# EAGLE board PCB_5 (EAGLE 6.5.0)
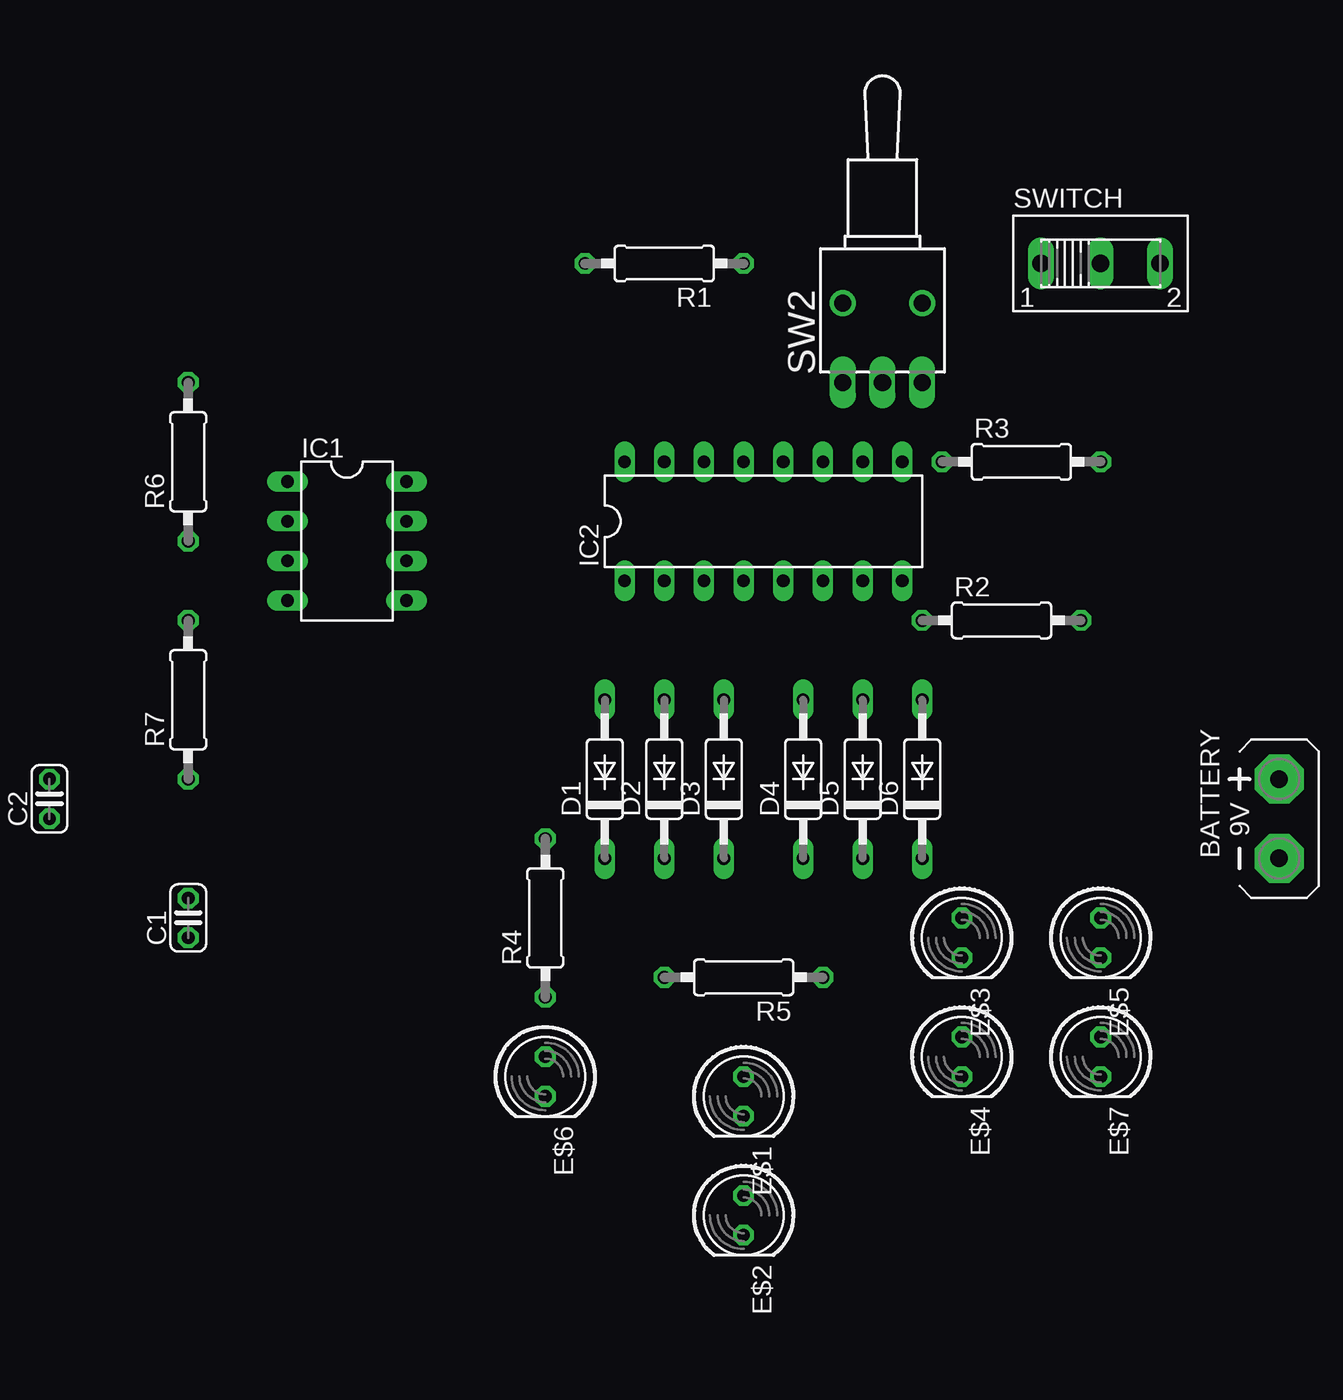
[diagram p0: board, top side]
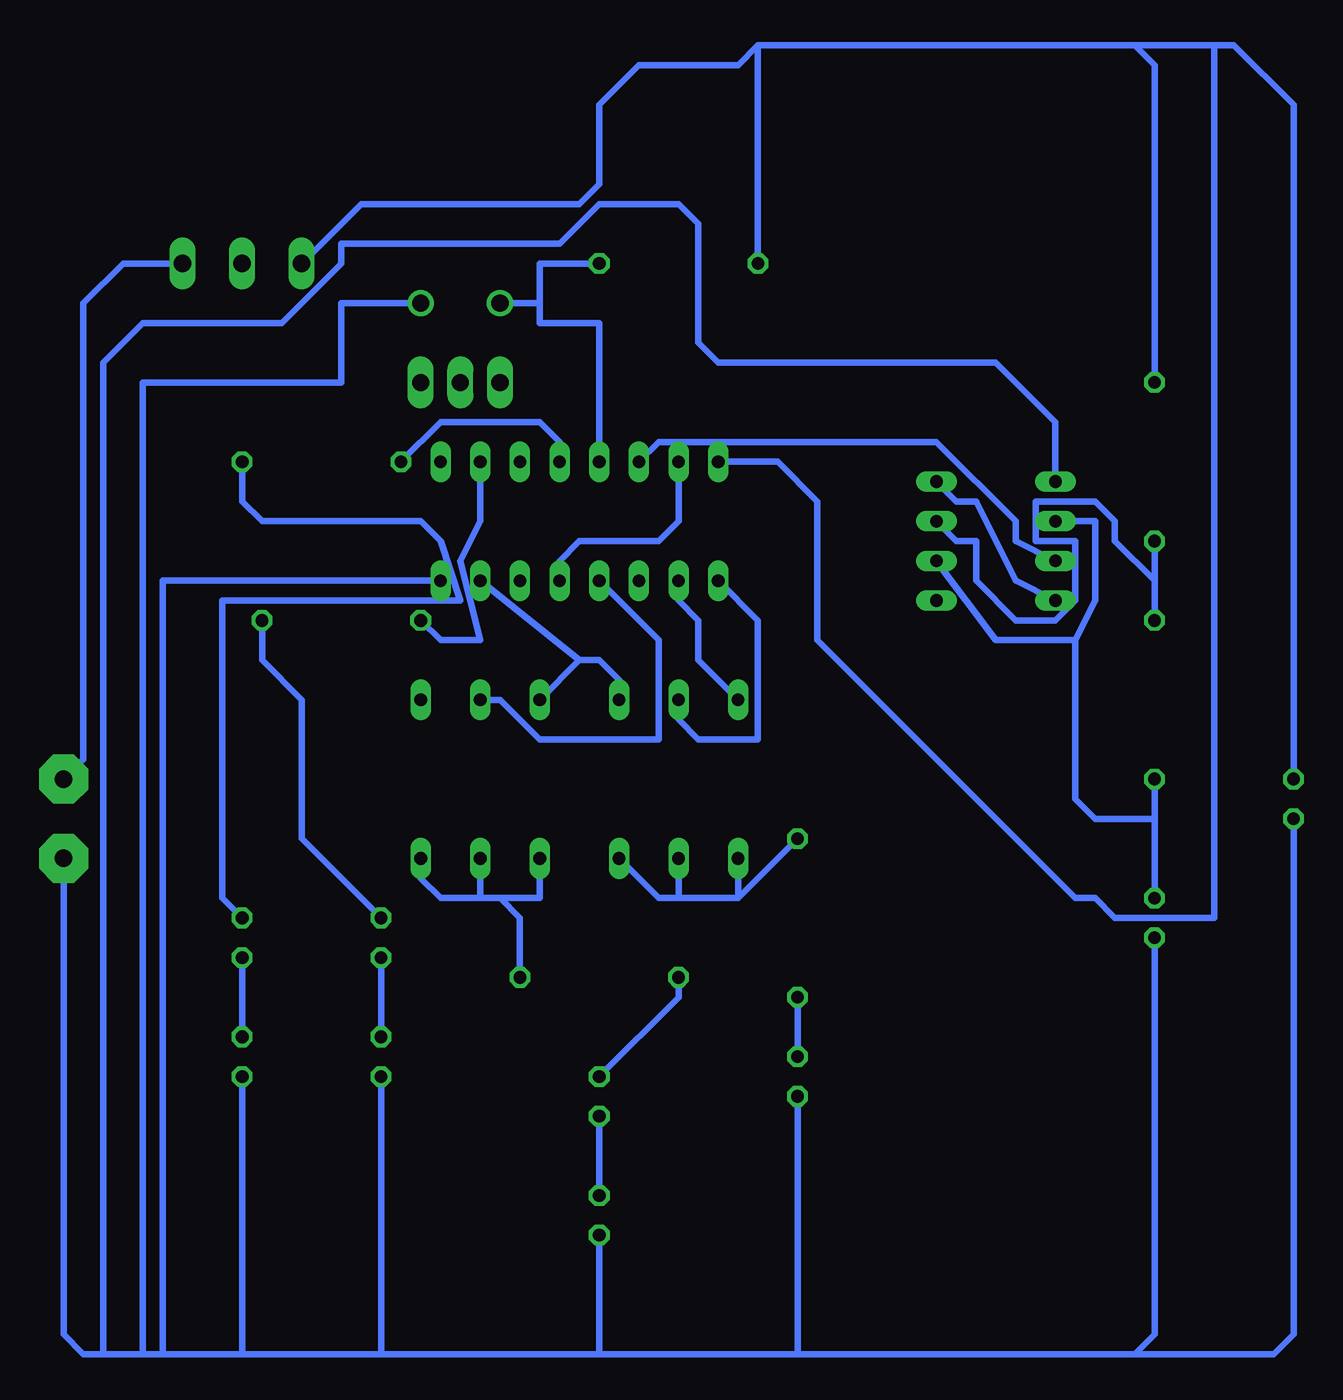
[diagram p1: board, bottom side, seen from below]

No outline drawn. Coordinates in mm, seen from the top.
Copper layers (1*16): Top 0.035mm / dielectric 1.5mm / Bottom 0.035mm
Design rules "default": minimum track width 10mil, minimum drill 24mil, track to track 8mil, track to pad 8mil, pad to pad 8mil, via to via 8mil, smd to smd 8mil, copper to edge 40mil, drill to drill 8mil, minimum pad ring 10mil, minimum via ring 8mil, stop-mask expansion 4mil, vias tented up to drill 0mil, thermal gap 10mil

## Footprints (pad centres in the part's own frame; a part is rotated, then mirrored left to right if it is on the bottom)
AB9V = drill 1.118 pad 3.15 octagon: + 0,2.54; - 0,-2.54
C025-024X044 = drill 0.813 octagon: 1 -1.27,0; 2 1.27,0
C2992 = drill 0.813 long: A 5.08,0; C -5.08,0
LED5MM = drill 0.813 octagon: A -1.27,0; K 1.27,0
DIL08 = drill 0.813 long: 1 -3.81,-3.81; 2 -1.27,-3.81; 3 1.27,-3.81; 4 3.81,-3.81; 5 3.81,3.81; 6 1.27,3.81; 7 -1.27,3.81; 8 -3.81,3.81
DIL16 = drill 0.813 long: 1 -8.89,-3.81; 2 -6.35,-3.81; 3 -3.81,-3.81; 4 -1.27,-3.81; 5 1.27,-3.81; 6 3.81,-3.81; 7 6.35,-3.81; 8 8.89,-3.81; 9 8.89,3.81; 10 6.35,3.81; 11 3.81,3.81; 12 1.27,3.81; 13 -1.27,3.81; 14 -3.81,3.81; 15 -6.35,3.81; 16 -8.89,3.81
0207/10 = drill 0.813 octagon: 1 -5.08,0; 2 5.08,0
TL3XWO = drill 1.1 pad 1.422 long: 1 -2.54,-5.08; 2 0,-5.08; 3 2.54,-5.08 | drill 1.1 pad 1.676: M1 -2.54,0; M2 2.54,0
255SB = drill 1.118 long: 1 -3.81,0; 2 0,0; 3 3.81,0

## Placement (x,y rotation side)
BATTERY  [AB9V]  101.6,45.72 0 top
C1  [C025-024X044]  31.75,39.37 90 top
C2  0.1uF  [C025-024X044]  22.86,46.99 90 top
D1  [C2992]  58.42,48.26 90 top
D2  [C2992]  62.23,48.26 90 top
D3  [C2992]  66.04,48.26 90 top
D4  [C2992]  71.12,48.26 90 top
D5  [C2992]  74.93,48.26 90 top
D6  [C2992]  78.74,48.26 90 top
E$1  [LED5MM]  67.31,27.94 270 top
E$2  [LED5MM]  67.31,20.32 270 top
E$3  [LED5MM]  81.28,38.1 270 top
E$4  [LED5MM]  81.28,30.48 270 top
E$5  [LED5MM]  90.17,38.1 270 top
E$6  [LED5MM]  54.61,29.21 270 top
E$7  [LED5MM]  90.17,30.48 270 top
IC1  [DIL08]  41.91,63.5 270 top
IC2  [DIL16]  68.58,64.77 0 top
R1  10k  [0207/10]  62.23,81.28 180 top
R2  330  [0207/10]  83.82,58.42 0 top
R3  330  [0207/10]  85.09,68.58 0 top
R4  470  [0207/10]  54.61,39.37 90 top
R5  330  [0207/10]  67.31,35.56 180 top
R6  10k  [0207/10]  31.75,68.58 90 top
R7  10k  [0207/10]  31.75,53.34 90 top
SW2  [TL3XWO]  76.2,78.74 0 top
SWITCH  [255SB]  90.17,81.28 0 top

## Library data of the parts
BATTERY = battery
C1 C2 R1-R7 = resistor
D1-D6 = diode
E$1-E$7 = led
IC1 IC2 = ic-package
SW2 SWITCH = switch

## Nets
S$1: C2.2 IC2.16 R1.2 R6.2 SWITCH.1
S$2: D1.A IC2.2
S$3: E$1.K E$2.A
S$4: E$3.K E$4.A
S$5: E$5.K E$7.A
S$6: BATTERY.- C1.1 C2.1 E$2.K E$4.K E$6.K E$7.K IC1.1 IC2.8 SW2.M2
S$7: D2.A IC2.1
S$8: D3.A D4.A IC2.7
S$9: IC1.4 IC1.8
S$10: D5.A IC2.4
S$11: IC2.10 R2.1
S$12: IC2.5 IC2.15
S$13: E$3.A R2.2
S$14: IC2.12 R3.1
S$15: E$5.A R3.2
S$16: D1.C D2.C D3.C R4.2
S$17: E$6.A R4.1
S$18: D4.C D5.C D6.C R5.1
S$19: E$1.A R5.2
S$20: C1.2 IC1.2 IC1.6 R7.1
S$21: IC2.13 R1.1 SW2.M1
S$23: IC1.7 R6.1 R7.2
S$24: IC1.3 IC2.14
S$26: BATTERY.+ SWITCH.3

## Tracks (layer width: path | path; a pad name or v marks a point on that pad's centre or on a via)
S$1
  Bottom 0.406: SWITCH.1 82.55,85.09 68.58,85.09 67.31,86.36 67.31,91.44 64.77,93.98 58.42,93.98 57.15,95.25 | IC2.16 55.88,68.58 53.34,66.04 53.34,57.15 36.83,40.64 35.56,40.64 34.29,39.37 27.94,39.37 27.94,95.25 | 27.94,95.25 26.67,95.25 22.86,91.44 C2.2 | 27.94,95.25 33.02,95.25 | R6.2 31.75,93.98 33.02,95.25 | R1.2 57.15,95.25 | 33.02,95.25 57.15,95.25
S$2
  Bottom 0.406: IC2.2 62.23,59.69 60.96,58.42 60.96,55.88 D1.A
S$3
  Bottom 0.406: E$2.A E$1.K
S$4
  Bottom 0.406: E$4.A E$3.K
S$5
  Bottom 0.406: E$5.K E$7.A
S$6
  Bottom 0.406: IC1.1 38.1,71.12 41.91,74.93 59.69,74.93 60.96,76.2 60.96,83.82 62.23,85.09 67.31,85.09 69.85,82.55 83.82,82.55 83.82,81.28 87.63,77.47 96.52,77.47 99.06,74.93 99.06,11.43 | SW2.M2 83.82,78.74 83.82,73.66 96.52,73.66 96.52,11.43 | IC2.8 95.25,60.96 95.25,11.43 | 33.02,11.43 24.13,11.43 22.86,12.7 C2.1 | 33.02,11.43 54.61,11.43 | 54.61,11.43 67.31,11.43 | 67.31,11.43 81.28,11.43 | 81.28,11.43 90.17,11.43 | 90.17,11.43 95.25,11.43 | 95.25,11.43 96.52,11.43 | 96.52,11.43 99.06,11.43 | 99.06,11.43 100.33,11.43 101.6,12.7 BATTERY.- | E$6.K 54.61,11.43 | E$2.K 67.31,11.43 | E$4.K 81.28,11.43 | E$7.K 90.17,11.43 | C1.1 31.75,12.7 33.02,11.43
S$7
  Bottom 0.406: D2.A 62.23,52.07 60.96,50.8 57.15,50.8 57.15,58.42 IC2.1
S$8
  Bottom 0.406: D3.A 66.04,54.61 67.31,55.88 68.58,55.88 | 68.58,55.88 D4.A | 68.58,55.88 IC2.7
S$9
  Bottom 0.406: IC1.4 40.64,60.96 43.18,66.04 44.45,66.04 IC1.8
S$10
  Bottom 0.406: D5.A 73.66,53.34 71.12,50.8 63.5,50.8 63.5,57.15 IC2.4
S$11
  Bottom 0.406: IC2.10 74.93,64.77 76.2,62.23 74.93,57.15 77.47,57.15 R2.1
S$12
  Bottom 0.406: IC2.5 69.85,62.23 68.58,63.5 63.5,63.5 62.23,64.77 IC2.15
S$13
  Bottom 0.406: R2.2 88.9,55.88 86.36,53.34 86.36,44.45 E$3.A
S$14
  Bottom 0.406: IC2.12 69.85,69.85 71.12,71.12 77.47,71.12 R3.1
S$15
  Bottom 0.406: R3.2 90.17,66.04 88.9,64.77 78.74,64.77 77.47,63.5 76.2,59.69 91.44,59.69 91.44,40.64 E$5.A
S$16
  Bottom 0.406: D1.C 58.42,40.64 | 58.42,40.64 62.23,40.64 | 62.23,40.64 63.5,40.64 D3.C | 62.23,40.64 D2.C | R4.2 58.42,40.64
S$17
  Bottom 0.406: R4.1 E$6.A
S$18
  Bottom 0.406: D6.C 78.74,41.91 77.47,40.64 74.93,40.64 | 74.93,40.64 73.66,40.64 | 73.66,40.64 71.12,40.64 D4.C | D5.C 74.93,40.64 | R5.1 72.39,39.37 73.66,40.64
S$19
  Bottom 0.406: R5.2 62.23,34.29 E$1.A
S$20
  Bottom 0.406: IC1.2 35.56,64.77 35.56,59.69 36.83,57.15 | 36.83,57.15 41.91,57.15 IC1.6 | 36.83,57.15 36.83,46.99 35.56,45.72 31.75,45.72 | R7.1 31.75,45.72 | 31.75,45.72 C1.2
S$21
  Bottom 0.406: IC2.13 67.31,77.47 71.12,77.47 71.12,78.74 | R1.1 71.12,81.28 71.12,78.74 | 71.12,78.74 SW2.M1
S$23
  Bottom 0.406: R6.1 31.75,60.96 | 31.75,60.96 R7.2 | 31.75,60.96 34.29,63.5 34.29,64.77 35.56,66.04 39.37,66.04 39.37,63.5 36.83,63.5 36.83,59.69 38.1,58.42 40.64,58.42 43.18,60.96 43.18,63.5 44.45,63.5 IC1.7
S$24
  Bottom 0.406: IC1.3 40.64,63.5 40.64,64.77 45.72,69.85 63.5,69.85 IC2.14
S$26
  Bottom 0.406: SWITCH.3 97.79,81.28 100.33,78.74 100.33,49.53 BATTERY.+